# Altium PCB 无线传感K412.PcbDoc (part 1 of 2)
Units mm, origin at the board's own origin, x right, y up, seen from the top; angles counter-clockwise.
Board outline 54.33 x 73.61 mm, 2 copper layers (Top Layer, Bottom Layer); 38 components, 69 nets, 149 pads, 71 vias.
Unrouted connection lines stored in the file: 1.
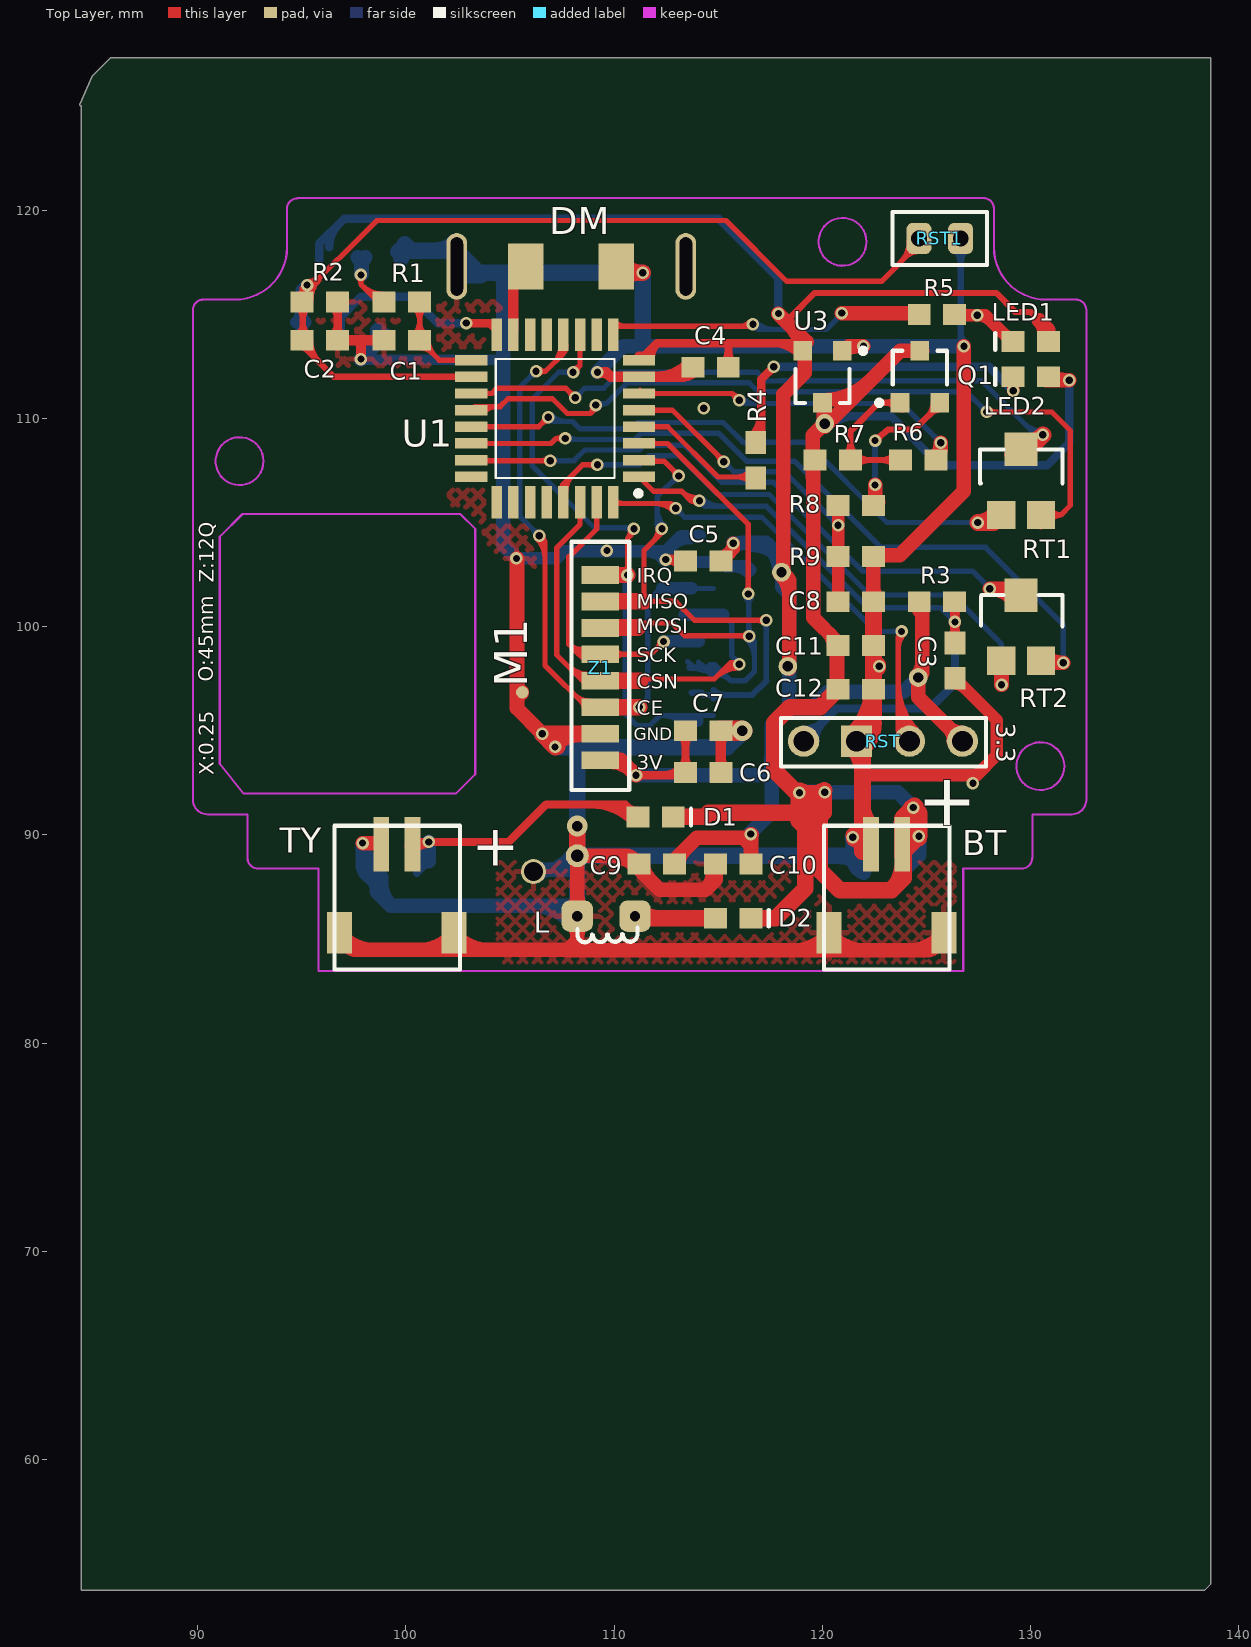
[diagram p0: Top Layer view]
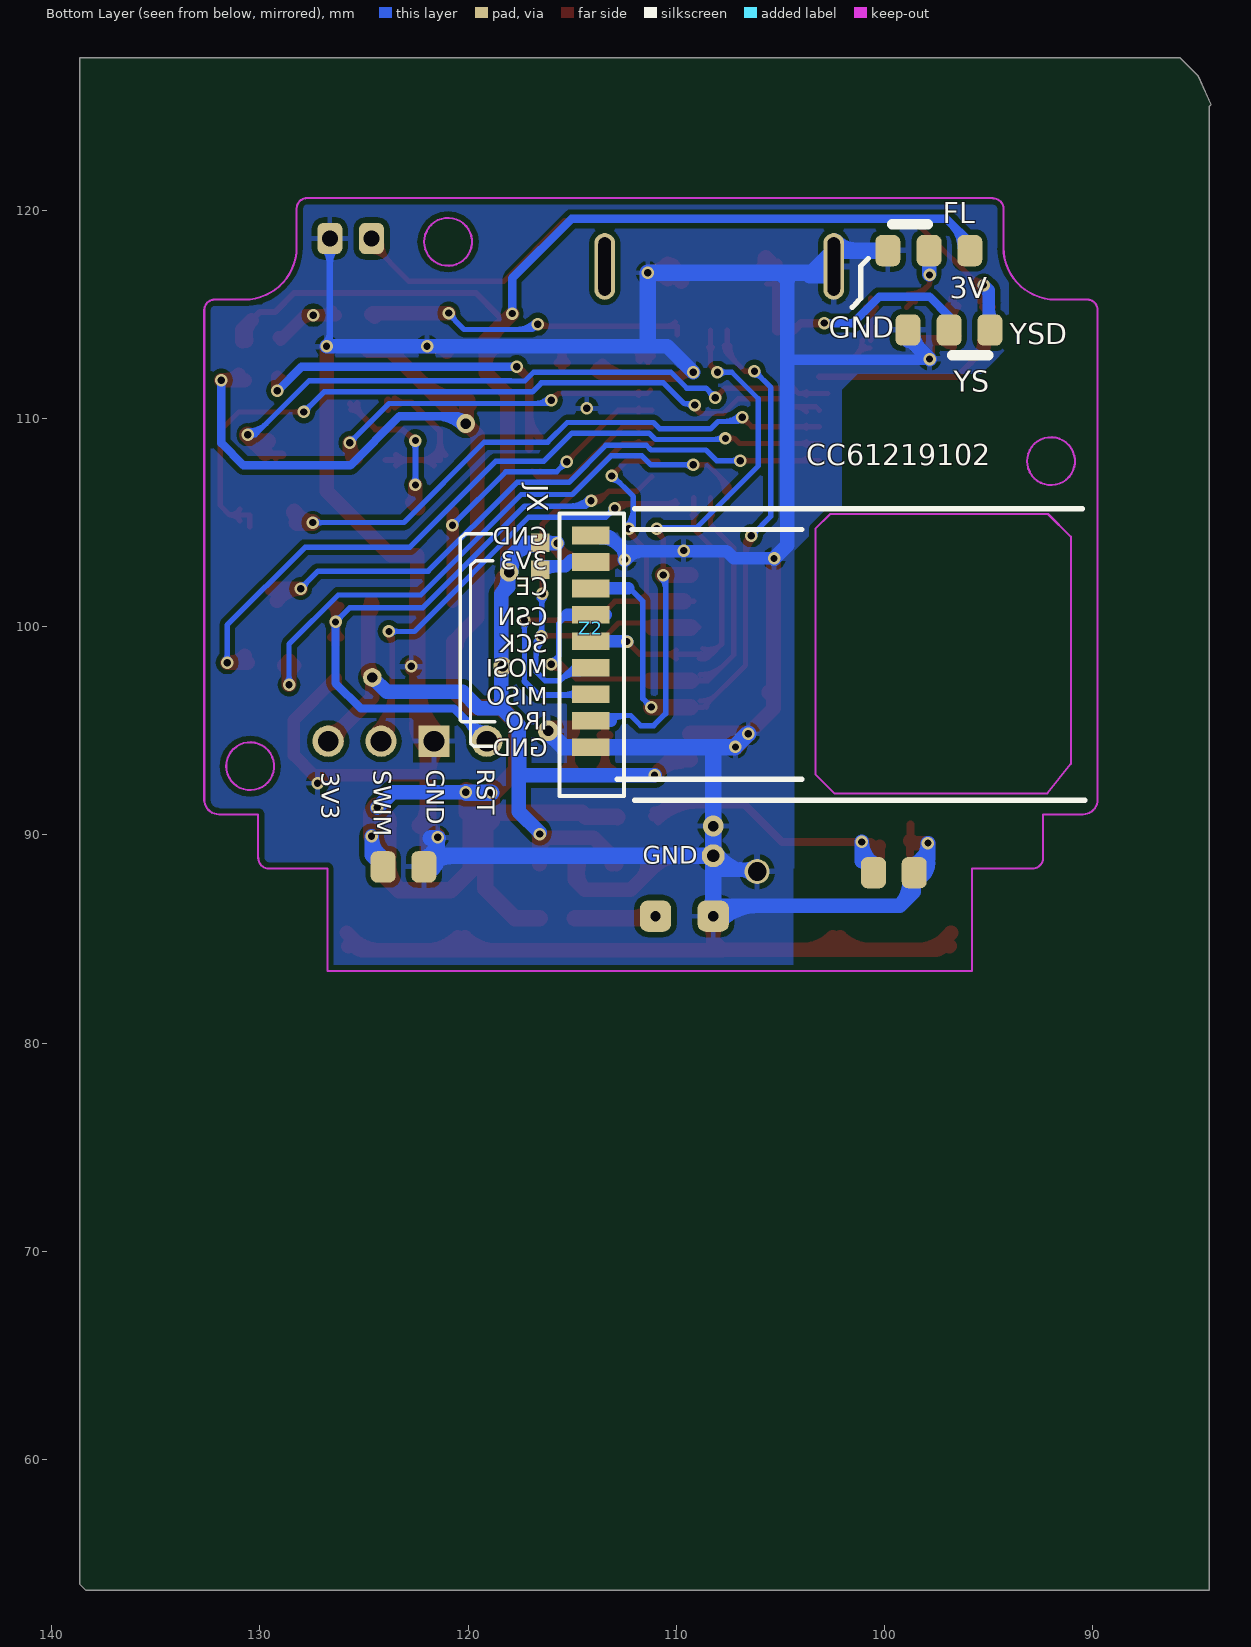
[diagram p1: Bottom Layer view, seen from below]

## Layer stack, top to bottom
Top Layer: signal copper 0.0356
Dielectric: dielectric 0.32, FR-4, Dk 4.8
Bottom Layer: signal copper 0.0356

## Board outline
84.328,125.07 84.404,124.993 84.404,53.721 138.354,53.721 138.659,54.026 138.659,127.33 85.827,127.33 84.938,126.441

## Design rules (kind name [scope] priority, off if disabled: settings)
Clearance [All] p1: gap=0.254
PolygonConnect [All] p1: connectstyle=Relief reliefconductorwidth=0.254 reliefentries=4 polygonreliefangle="90 Angle"
RoutingVias [All] p1: holewidth=0.711 width=1.27 viastyle="Through Hole" minholewidth=0.711 minwidth=1.27 maxholewidth=0.711 maxwidth=1.27
SilkscreenOverComponentPads [All] p1: minsilkscreentomaskgap=0.254
SolderMaskExpansion [All] p1: expansion=0.102
TestPointUsage FabricationTestPointUsage [All] p1: valid=0 allowmultiple=FALSE
Testpoint FabricationTestpoint [All] p1: side=3 testpointundercomponent=TRUE minsize=1.016 maxsize=2.54 preferedsize=1.524 minholesize=0 maxholesize=1.016 preferedholesize=0.813 testpointgrid=0.025 style=297 order=0-112345678
Width [All] p1: maxlimit=2 minlimit=0.254 preferedwidth=0.254 minimp=50.000000 maximp=50.000000 favimp=50.000000
23 further rules are at their usual default settings.

## Components (designator, comment, footprint, x,y, rotation, side; value= is the part's Value field where it differs from the comment)
BT "ZH1.5*2" MHDR1X6 123.1,89.55 r0 top locked
C1 "0.01uf" CR1608-0603 99.8,113.757 r180 top (schematic designator C6)
C2 "0.01uf" CR1608-0603 95.86,113.757 r0 top (schematic designator C7)
C3 "0.1uf" CR1608-0603 126.36,98.374 r90 top (schematic designator C9)
C4 "0.1uf" CR1608-0603 114.63,112.46 r180 top (schematic designator C6)
C5 "0.01uf" CR1608-0603 114.275,103.149 r180 top (schematic designator C3)
C6 "0.1uf" CR1608-0603 114.275,93 r0 top
C7 "10uf" CR1608-0603 114.275,95 r0 top (schematic designator C6)
C8 "100p" CR1608-0603 121.6,101.2 r180 top (schematic designator C12)
C9 "0.1uf" CR1608-0603 112.039,88.6 r0 top (schematic designator C8)
C10 "10uf" CR1608-0603 115.722,88.6 r0 top
C11 "10uf" CR1608-0603 121.6,99.1 r180 top (schematic designator C1)
C12 "22uf" CR1608-0603 121.6,97 r180 top (schematic designator R8)
D1 "SS14" CC1608-0603 111.989,90.856 r180 top (schematic designator D2)
D2 "1N4007" CC1608-0603 115.722,86 r180 top
DM "3*4*2小龟按键" HDR1X2#1 111.8,115.3 r0 top locked (schematic designator FW)
JX "" CR1005-0402 116.54,103.383 r90 bottom (schematic designator C3)
LED1 "LED-R" CC1608-0603 130,113.7 r0 top (schematic designator R1)
LED2 "LED-G" CC1608-0603 130,112 r0 top (schematic designator R1)
Q1 "S8550" SO-G3/C2.5#1 124.68,112 r0 top (schematic designator U3)
R1 "1K" CR1608-0603 99.8,115.6 r0 top
R2 "1M" CR1608-0603 95.86,115.6 r0 top
R3 "10K" CR1608-0603 125.5,101.2 r0 top (schematic designator R2)
R4 "470" CR1608-0603 116.8,108 r90 top (schematic designator R9)
R5 "1K" CR1608-0603 125.5,115 r0 top (schematic designator R9)
R6 "4.7K" CR1608-0603 124.6,108 r180 top
R7 "10K" CR1608-0603 120.5,108 r0 top (schematic designator R2)
R8 "180K" CR1608-0603 121.6,105.816 r0 top (schematic designator 7R)
R9 "360K" CR1608-0603 121.6,103.378 r180 top (schematic designator R8)
RST "2.54*4" HDR1X4 119.1,94.5 r0 top locked (schematic designator Saoxie)
RST1 "2.54*4" HDR1X2#2 124.1,118.643 r0 top locked (schematic designator Saoxie)
RT1 "100K" SO-G3/C2.5#2 129.54,107.264 r0 top locked (schematic designator U4)
RT2 "100K" SO-G3/C2.5#2 129.54,100.267 r0 top locked (schematic designator U4)
TY "ZH1.5*2" MHDR1X6 99.583,89.55 r0 top locked
U1 "STM8L151K4T6" TQFP32 107.163,110 r180 top locked
U3 "XC6206 9v  6ua 250ma" SO-G3/C2.5#1 120,112 r180 top
Z1 "SI24R1" MHDR1X8 109.322,102.482 r270 top
Z2 "NRF24L01" MHDR1X8 114.1,95.487 r90 bottom

## Footprints (in the part's own frame and the unit in brackets; to place one, negate y for a bottom-side part, rotate by r counter-clockwise, add the part's x,y. Pads: shape width x height; smd on the part's side, far side on the other; paste and mask are expansions set on the pad)
CC1608-0603 [mm] "Chip Capacitor; Body 1.6 x 0.8 mm (LxW typ)"
  rect 1.1x1 smd: 1(-0.85,0) 2(0.85,0)
  silkscreen extent -1.7,-0.4 -1.7,0.4
CR1005-0402 [mm]
  rect 0.9x0.9 smd: 1(-0.65,0) 2(0.65,0)
CR1608-0603 [mm] "Chip Resistor; Body 1.6 x 0.8 mm (LxW typ)"
  rect 1.1x1 smd: 1(-0.85,0) 2(0.85,0)
HDR1X2#1 [mm]
  rect 1.7x2.2 smd: 1(-6.047,2) 2(-1.7,2)
HDR1X2#2 [mm] "Connector; Header; 2 Position"
  rrect50% 1.2x1.5 hole 0.76: 1(0.539,0) 2(2.54,0)
  silkscreen extent -0.74,-1.27 3.81,1.27
HDR1X4 [mm] "Connector; Header; 4 Position"
  round 1.5 hole 1: 1(0,0) 3(5.08,0) 4(7.62,0)
  rect 1.5x1.5 hole 1: 2(2.54,0)
  silkscreen extent -1.08,-1.22 8.75,1.12
MHDR1X6 [mm] "Connector; Header; 6 Position"
  rect 0.76x2.6 smd: 1(-0.77,0) 2(0.73,0)
  silkscreen extent -3.02,-6.02 3.01,0.89
MHDR1X8 [mm] "Connector; Header; 8 Position"
  rect 0.85x1.8 smd: 1(0,0) 2(1.27,0) 3(2.54,0) 4(3.81,0) 5(5.08,0) 6(6.35,0) 7(7.62,0) 8(8.89,0)
  silkscreen extent -1.6,-1.36 10.33,1.4
SO-G3/C2.5#1 [mm]
  rect 0.9x0.95 smd: 1(-0.95,-1.25) 2(0.95,-1.25) 3(0,1.25)
  silkscreen extent -2.07,-1.37 1.3,1.25
SO-G3/C2.5#2 [mm]
  rect 1.35x1.35 smd: 1(-0.95,-1.9) 2(0.95,-1.9)
  rect 1.6x1.6 smd: 3(0,1.25)
  silkscreen extent -1.96,-0.38 1.99,1.25
TQFP32 [mm] "QFP; 32 Leads; Body 7 x 7 mm; Pitch 0.8 mm"
  rect 1.55x0.5 smd: 1(-4.025,2.8) 2(-4.025,2) 3(-4.025,1.2) 4(-4.025,0.4) 5(-4.025,-0.4) 6(-4.025,-1.2) 7(-4.025,-2) 8(-4.025,-2.8) 18(4.025,-2) 19(4.025,-1.2) 20(4.025,-0.4) 21(4.025,0.4) 22(4.025,1.2) 23(4.025,2) 24(4.025,2.8)
  rect 0.5x1.55 smd: 9(-2.8,-4.025) 10(-2,-4.025) 11(-1.2,-4.025) 12(-0.4,-4.025) 13(0.4,-4.025) 14(1.2,-4.025) 15(2,-4.025) 16(2.8,-4.025) 26(2,4.025) 27(1.2,4.025) 28(0.4,4.025) 29(-0.4,4.025) 30(-1.2,4.025) 31(-2,4.025) 32(-2.8,4.025)
  rect 1.55x0.5 smd mask+0.102: 17(4.025,-2.8)
  rect 0.5x1.55 smd paste+0: 25(2.8,4.025)
  silkscreen extent -4.13,-2.85 2.85,3.72

## Part data
C1 C4 C6 C7 C8 C9 C11 C12 LED1 LED2 R2 R3 R7 R8 R9: library part Res3, "Resistor"
C2 C3 C10: library part "Cap Semi", "Capacitor (Semiconductor SIM Model)"
C5: library part "Cap Semi", "Capacitor (Semiconducto"
D1 D2 R1: library part "Diode 1N4007", "1 Amp General Purpose Rectifier"
JX: library part "Cap Semi", "Capacit"
R4 R5 R6: library part "Cap Pol3"
RST RST1: library part "Header 4", "Header, 4-Pin"
U1: library part ST72F324K4T6

## Free pads (board coordinates)
  rrect50% 1.2x1.5 smd far side: 0(94.945,114.249) 0(95.91,118.059) 0(96.901,114.249) 0(97.866,118.059) 0(98.577,88.189) 0(98.882,114.249) 0(99.847,118.059) 0(100.533,88.189) 0(122.123,88.468) 0(124.079,88.468)
  rect 1.2x2 smd: 0(96.81,85.306) 0(102.314,85.306) 0(120.327,85.306) 0(125.831,85.306)
  oval 1x3.2 hole 0.6 slot 2.8 at 90 deg: 0(102.442,117.3) 0(113.44,117.3)
  round 1.2 hole 0.9: 0(106.121,88.24)
  round 1.1 hole 0.6: 0(108.229,89.002)
  rect 1.8x0.85 smd far side: 0(114.1,94.217)
  round 0.9 hole 0.5: 1(118.034,102.616) 1(118.339,98.095) 1(124.6,97.561)
  round 0.6 smd: 3(105.588,96.85)
  rrect50% 1.5x1.5 hole 0.5: 3(108.229,86.1) 3(111,86.1)

## Via types
v1: diameter 0.6, hole 0.35, Top Layer to Bottom Layer, 68 vias
v2: diameter 1, hole 0.5, Top Layer to Bottom Layer, 2 vias
v3: diameter 0.9, hole 0.5, Top Layer to Bottom Layer, 1 vias

## Nets (pads, with @x,y where several pads share a name; then routed paths per layer and width w, separated by ;. In a path a pad name is that pad's centre, name@x,y a point inside that pad or via, vN(x,y) a via of type N, cw(c..) or ccw(c..) an arc to the next point about the centre after c; other vN are vias at no path point)
3.3V: 
3V3: C4.1 C5.1 C6.1 C7.1 C9.2 C10.2 JX.1 JX.2 LED1.2 pad.0@95.91,118.059 pad.1 R3.1 RST.4 U1.8 U3.2 Z1.8 Z2.7 | length 148.8
  Top Layer w0.3: 118.516,114.91 119.634,116.027 128.346,116.027 129.261,115.113 129.997,115.113 130.4,114.71
  Top Layer w0.4: v1(111.049,92.862) 113.146,92.862 113.425,93.142 C7.1@113.425,95.123 ; U1.8@111.188,113.011 111.461,113.011 112.065,113.614 ; U1.8@111.364,112.775 cw(c111.645,112.795) U1.8@111.446,112.995 ; U1.8@111.763,112.804 cw(c112.801,112.878) 112.065,113.614 ; 112.319,92.862 ccw(c112.319,94.056) C6.1@113.163,93.212 ; C6.1@113.213,93.212 ccw(c112.701,93.724) 113.425,93.724 ccw(c114.149,93.724) C6.1@113.637,93.212 ; C7.1@113.213,94.788 cw(c112.701,94.276) 113.425,94.276 cw(c114.149,94.276) C7.1@113.637,94.788 ; C4.1@115.268,112.672 ccw(c114.723,113.217) 115.494,113.217 ; C4.1@115.48,112.471 115.494,112.485 115.494,113.614 ; 115.494,113.151 ccw(c116.172,113.151) C4.1@115.692,112.672 ; 117.627,113.614 cw(c117.627,111.852) U3.2@118.873,113.098 ; 118.593,113.614 cw(c118.593,112.818) U3.2@119.156,113.381 ; U3.2@119.15,113.25 118.786,113.614 115.494,113.614 ; 112.065,113.614 115.494,113.614
  Top Layer w0.65: C5.1@115.125,103.149 115.722,103.747 v1(115.722,104.013) cw(c115.02,104.013) C5.1@115.144,103.322 ; C5.1@115.35,103.149 cw(c115.893,103.149) C5.1@115.509,103.533
  Top Layer w0.7: Z1.8@109.322,93.599 110.312,93.599 v1(111.049,92.862) ; Z1.8@109.797,93.517 cw(c109.797,92.074) 110.817,93.094 ; C9.2@112.889,88.6 112.889,88.785 113.97,89.865 116.191,89.865 116.572,89.484 ; C9.2@113.089,88.6 cw(c114.018,88.6) 113.361,89.257 ; C10.2@116.572,88.6 116.572,89.484 ; v1@116.572,90.043 116.572,89.484 ; v1(117.886,115.037) 119.234,113.689 U3.2@119.075,113.529 ; pad.1@117.963,102.545 cw(c116.873,101.455) 118.415,101.455 ; pad.1@118.022,102.517 cw(c117.973,102.077) 118.415,102.077 ; pad.1@118.034,102.616 pad.1@118.11,102.54 ; pad.1@118.11,102.514 pad.1@118.11,102.54 ; pad.1@118.415,97.993 118.415,102.235 pad.1@118.11,102.54 ; 118.456,114.467 cw(c117.265,113.275) U3.2@118.95,113.275 ; U3.2@118.979,113.154 cw(c118.567,112.742) 119.15,112.742 ; U3.2@119.15,113.25 119.15,112.19 118.11,111.15 pad.1@118.11,102.54 ; pad.1@124.529,97.632 ccw(c123.876,98.286) 124.8,98.286 ; R3.1@124.594,101.094 cw(c124.097,100.596) 124.8,100.596 ; R3.1@124.6,101.088 cw(c124.201,100.641) 124.8,100.641 ; R3.1@124.65,101.2 124.65,100.8 124.8,100.65 124.8,97.761 pad.1@124.6,97.561 124.6,96.62 RST.4@126.72,94.5 ; RST.4@126.32,94.5 ccw(c125.354,94.5) 126.037,95.183 ccw(c126.72,95.866) RST.4@126.72,94.9 ; LED1.2@130.655,113.74 ccw(c129.696,114.006) 130.4,114.71 130.85,114.26 LED1.2@130.85,113.7 ; 116.252,89.865 ccw(c116.252,90.352) 116.596,90.008 cw(c116.252,90.352) 116.252,89.865
  Bottom Layer w0.4: pad.0@95.834,117.602 95.834,118.389 97.028,119.583 115.037,119.583 117.886,116.733 v1(117.886,115.037) ; pad.0@96.31,118.209 cw(c97.895,118.209) 96.775,119.33
  Bottom Layer w0.6: Z2.7@113.722,103.107 114.943,103.107 115.037,103.2 115.341,102.895 116.378,102.895 JX.1@116.54,102.733 ; 115.787,102.895 cw(c115.787,101.98) JX.1@116.434,102.627
  Bottom Layer w0.7: v1(111.049,92.862) 117.551,92.862 117.551,93.726 ; v1(115.722,104.013) 116.103,104.013 116.083,104.033 117.285,104.033 118.085,103.233 118.085,101.905 118.415,101.575 ; JX.2@116.54,103.933 cw(c116.54,101.895) 117.982,103.336 ; v1@116.572,90.119 117.577,91.123 117.577,95.275 118.389,96.088 ; 117.391,103.927 cw(c116.08,102.616) pad.1@117.934,102.616 ; pad.1@118.131,102.592 ccw(c119.175,102.335) 118.415,101.575 ; pad.1@124.6,97.561 123.914,96.876 120.269,96.876 119.482,96.088 118.415,96.088 ; 118.389,96.088 118.415,96.063 118.415,96.088 ; 118.389,96.088 118.415,96.088 ; 118.415,96.088 118.415,101.575
  other v1: 116.561,90.043
4.2V: 
5V: D1.2 pad.0@100.533,88.189 TY.2 | length 22.2
  Top Layer w0.4: TY.2@100.305,89.179 100.787,89.662 ; TY.2@100.401,89.276 cw(c101.092,88.585) v1@101.092,89.562 ; TY.2@100.441,89.423 cw(c101.018,88.845) v1@101.018,89.662 ; TY.2@100.474,89.469 cw(c100.787,89.312) 100.787,89.662 ; 108.893,91.465 cw(c108.893,88.66) D1.2@110.876,90.644 ; 109.858,91.465 cw(c109.858,89.626) D1.2@111.159,90.927 ; 110.541,91.453 cw(c109.944,90.856) D1.2@110.789,90.856 ; D1.2@110.662,91.333 ccw(c111.089,91.759) D1.2@111.089,91.156 ; D1.2@111.139,90.856 110.529,91.465 106.731,91.465 104.927,89.662 v1(101.092,89.662) 100.787,89.662
  Top Layer w0.6: TY.2@100.243,89.479 100.279,89.443 TY.2@100.279,88.976
  Bottom Layer w0.4: pad.0@100.533,88.189 pad.0@101.092,88.748
  Bottom Layer w0.7: pad.0@100.419,88.561 ccw(c99.855,89.662) v1(101.092,89.662) pad.0@101.092,88.748
38BC1: 
38BC2: 
<Z: 
AM: 
BH1: 
BH2: 
BI-R: 
BT: BT.2 C11.2 C12.2 D1.1 D2.1 LED2.2 pad.0@124.079,88.468 Q1.3 R7.1 U3.3 | length 120.3
  Top Layer w0.7: 119.507,90.195 119.736,89.967 ; 119.532,107.188 119.532,109.195 120.066,109.728 U3.3@120.066,110.592 ; 119.532,107.475 cw(c120.125,107.475) R7.1@119.706,107.894 ; 119.532,108.525 ccw(c120.125,108.525) R7.1@119.706,108.106 ; R7.1@119.552,108.037 119.552,100.437 120.701,99.289 C12.2@120.701,97 ; U3.3@119.929,110.654 cw(c119.517,110.242) 120.1,110.242 ; U3.3@120,110.875 ccw(c120,114.171) 122.331,111.84 ; U3.3@120.1,110.75 120.1,109.61 123.74,113.25 Q1.3@124.8,113.25 ; v3@120.117,109.853 ccw(c120.117,110.401) 120.504,110.014 ; 120.31,99.679 cw(c119.731,99.1) C11.2@120.55,99.1 ; BT.2@123.855,89.533 cw(c124.638,88.987) v1(124.638,89.941) 124.251,89.941 ; LED2.2@130.734,111.836 v1(131.851,111.836) ; LED2.2@131.006,112.106 ccw(c131.658,112.758) v1@131.658,111.836
  Top Layer w0.8: D1.1@112.839,90.856 112.852,90.869 114.339,90.869 114.529,91.059 118.866,91.059 ; D2.1@116.572,86 117.75,86 119.177,87.427 119.177,90.362 ; v1@118.897,91.999 120.053,91.999 120.053,91.059 120.002,91.11 ; v1@118.926,92.12 cw(c118.696,91.343) 119.507,91.343 ; v1@118.964,92.099 cw(c117.874,90.883) 119.507,90.883 ; 119.177,90.576 119.177,90.362 ; 119.329,89.127 119.329,90.209 119.177,90.362 ; 119.431,89.967 119.507,89.967 ; 119.507,89.663 119.507,89.967 ; 119.507,90.887 cw(c121.189,90.887) v1@120.049,92.123 ; 119.507,91.356 cw(c120.333,91.356) v1@120.087,92.145 ; 119.507,91.719 119.507,91.059 ; 119.558,89.967 119.736,89.967 119.507,89.967 ; C12.2@120.75,97 119.889,96.139 118.44,96.139 117.696,95.395 117.696,93.099 118.866,91.928 118.866,91.059 ; 123.323,87.356 ccw(c122.049,88.63) BT.2@123.85,88.63 ; BT.2@123.81,90.47 cw(c124.523,90.47) 124.019,90.974 ; BT.2@123.827,90.45 ccw(c123.991,91.35) 124.638,90.703 ; BT.2@123.83,89.53 ccw(c123.83,90.486) v1@124.506,89.81 ; BT.2@124.053,89.681 ccw(c123.979,89.942) 124.251,89.942 124.251,90.316 ; 124.251,89.554 cw(c124.755,89.554) v1@124.609,90.037 ; v1@124.258,91.313 ccw(c124.692,91.313) 124.385,91.007 ; 124.384,91.008 124.435,90.957 ; v1@124.446,91.362 cw(c123.984,91.103) 124.358,90.729 124.308,90.678 ccw(c123.861,91.125) v1@124.452,91.348 ; v1@124.45,91.352 cw(c123.585,90.982) 124.251,90.316 ; v1@124.554,89.886 cw(c125.098,90.244) 124.638,90.703 ; v1@124.612,89.845 cw(c124.739,90.316) 124.251,90.316 ; 124.638,90.805 124.638,91.034 ; 118.866,91.059 119.507,91.059 ; 118.866,91.059 118.866,90.672 119.177,90.362 ; 119.507,89.967 119.507,90.195 119.507,91.059 ; 119.507,91.059 119.863,91.059 119.863,88.316 120.828,87.351 123.317,87.351 123.895,87.929 BT.2@123.895,88.915 ; BT.2@123.895,88.915 123.895,89.199 v1(124.638,89.941) 124.638,90.703 ; BT.2@123.895,88.915 123.83,88.98 BT.2@123.83,89.55 123.83,90.785 v1(124.358,91.313) 124.638,91.034 ; 124.251,90.316 124.638,90.703 ; v1@124.429,91.384 cw(c123.925,90.88) 124.638,90.88 ; v1@124.429,91.384 cw(c123.925,90.88) 124.638,90.88 ; v1@124.429,91.384 cw(c123.925,90.88) 124.638,90.88 ; v1@124.429,91.384 cw(c123.925,90.88) 124.638,90.88 ; 124.638,90.703 124.638,91.034 ; BT.2@123.83,90.45 ccw(c123.83,91.052) 124.256,90.626 cw(c123.83,91.052) BT.2@123.83,90.45 ; v1@124.424,91.388 cw(c124.013,90.918) 124.638,90.918 ccw(c124.013,90.918) v1@124.424,91.388
  Bottom Layer w0.4: v3@120.011,109.859 cw(c120.613,109.257) 120.613,110.109 ; v3(120.117,109.753) 120.472,110.109 123.292,110.109 125.654,107.747 130.785,107.747 131.851,108.814 v1(131.851,111.836) ; v3@120.293,109.577 cw(c121.579,108.291) 121.579,110.109
  Bottom Layer w0.7: v1(120.117,92.05) 123.622,92.05 v1@124.356,91.315 ; pad.0@123.965,88.841 ccw(c123.401,89.941) v1(124.638,89.941) 124.638,89.027 pad.0@124.079,88.468
  Bottom Layer w0.8: v1(118.897,92.024) 120.091,92.024 v1(120.117,92.05)
BTJC: R6.1 U1.6 | length 20.4
  Top Layer w0.254: U1.6@111.245,111.354 111.398,111.2 115.673,111.2 v1(116.002,110.871) ; U1.6@111.8,111.113 cw(c112.01,110.903) 112.01,111.2 cw(c112.01,111.497) U1.6@111.8,111.287 ; v1@115.829,110.871 ccw(c115.411,110.871) 115.706,111.166 ccw(c116.002,111.462) v1@116.002,111.044
  Top Layer w0.6: R6.1@125.368,108.15 ccw(c124.761,108.839) v1(125.679,108.839) R6.1@125.679,108.43 ; R6.1@125.556,108.2 R6.1@125.603,108.153
  Top Layer w0.7: R6.1@125.394,108.106 ccw(c124.706,108.795) v1@125.679,108.795 ; R6.1@125.679,108.456 v1(125.679,108.839)
  Bottom Layer w0.254: v1(116.002,110.871) 116.154,110.719 123.8,110.719 v1(125.679,108.839) ; v1@116.124,110.993 ccw(c116.787,111.657) 116.787,110.719 ; v1@125.506,108.839 ccw(c125.089,108.839) 125.384,109.134 ccw(c125.679,109.43) v1@125.679,109.012
CE: U1.12 Z1.6 Z2.6 | length 42.2
  Top Layer w0.254: v1(106.248,112.268) 106.705,112.268 107.563,113.125 U1.12@107.563,114.236 ; v1@106.278,104.246 cw(c105.308,103.276) 106.68,103.276 ; v1@106.371,112.146 cw(c106.666,111.85) 106.666,112.268 cw(c106.666,112.686) v1@106.371,112.39 ; v1(106.401,104.369) 106.68,104.089 ; v1@106.408,104.196 cw(c106.422,103.831) 106.68,104.089 ; v1@106.458,104.426 cw(c105.922,103.89) 106.68,103.89 ; v1@106.573,104.362 ccw(c106.938,104.347) 106.68,104.089 ; 107.088,112.65 ccw(c106.238,113.5) U1.12@107.44,113.5 ; U1.12@107.476,113.413 cw(c107.266,113.203) 107.563,113.203 cw(c107.86,113.203) U1.12@107.65,113.413 ; 107.521,113.084 ccw(c107.105,113.5) U1.12@107.694,113.5 ; 108.077,96.749 ccw(c108.847,97.519) Z1.6@108.847,96.43 ; Z1.6@108.446,96.38 cw(c108.199,96.132) Z1.6@108.549,96.132 ; Z1.6@109.322,96.132 108.694,96.132 106.68,98.146 106.68,104.089
  Top Layer w0.8: Z1.6@109.322,96.132 v1@111.201,96.132
  Bottom Layer w0.254: v1@106.075,112.268 cw(c105.658,112.268) 105.953,111.973 cw(c106.248,111.677) v1@106.248,112.095 ; v1@106.228,104.369 ccw(c105.81,104.369) 106.105,104.664 ccw(c106.401,104.959) v1@106.401,104.542 ; v1(106.248,112.268) 105.461,111.481 105.461,105.308 v1(106.401,104.369) ; v1(111.201,96.139) 111.608,96.545 111.608,101.219 112.226,101.837 Z2.6@114.766,101.837 ; v1@111.201,96.312 ccw(c111.201,96.73) 111.497,96.434 ccw(c111.792,96.139) v1@111.374,96.139 ; Z2.6@113.414,101.626 ccw(c112.906,101.118) 112.906,101.837 ccw(c112.906,102.556) Z2.6@113.414,102.048
  Bottom Layer w0.6: 112.319,101.837 Z2.6@113.722,101.837
CKTS: 
CSN: U1.30 Z1.5 Z2.5 | length 27.9
  Top Layer w0.254: 107.73,98.163 ccw(c108.847,99.279) Z1.5@108.847,97.7 ; 108.163,97.729 ccw(c108.847,98.412) Z1.5@108.847,97.446 ; U1.30@108.276,105.363 cw(c108.066,105.153) 108.363,105.153 cw(c108.66,105.153) U1.30@108.45,105.363 ; U1.30@108.363,106.186 108.363,104.908 107.239,103.784 107.239,98.654 108.483,97.409 109.296,97.409 109.144,97.257 Z1.5@109.322,97.402 ; 111.252,97.485 114.808,97.485 115.591,98.268 ; 114.883,97.56 cw(c116.002,96.441) v1@116.002,98.023 ; 115.316,97.993 cw(c116.002,97.308) v1@116.002,98.277 ; v1@115.85,98.114 ccw(c115.591,97.973) 115.591,98.268 ; v1@115.983,98.268 115.591,98.268
  Top Layer w0.8: Z1.5@109.296,97.409 111.252,97.409
  Bottom Layer w0.254: 115.231,100.567 115.646,100.152 115.646,98.604 v1@115.983,98.268 ; 115.669,98.581 cw(c115.285,98.196) v1@115.829,98.196 ; 115.796,98.455 ccw(c116.002,98.661) v1@116.002,98.369
  Bottom Layer w0.6: Z2.5@113.386,100.567 115.231,100.567
  other v1: 116.002,98.196
DCJC: 
DM: DM.1 U1.15 | length 6.1
  Top Layer w0.254: DM.1@105.653,116.459 105.054,116.459 105.639,117.043 DM.1@105.753,117.3
  Top Layer w0.5: U1.15@105.163,114.236 DM.1@105.163,117.431
  Top Layer w0.8: DM.1@105.715,117.119 105.715,117.678 105.486,117.45 DM.1@105.753,117.3
DM-D: 
DYKG: 
DYKZ: 
FI-R: 
FL: C1.1 R1.2 U1.17 | length 9.2
  Top Layer w0.254: C1.1@100.386,114.021 ccw(c99.725,114.682) 100.66,114.682 ; R1.2@100.386,115.336 cw(c99.725,114.675) 100.66,114.675 ; C1.1@100.66,113.757 R1.2@100.66,115.773 ; 100.66,114.633 ccw(c101.526,114.633) C1.1@100.914,114.021 ; 100.66,114.724 cw(c101.526,114.724) R1.2@100.914,115.336 ; C1.1@100.7,113.384 cw(c100.7,112.604) 101.251,113.156 ; C1.1@100.95,113.457 101.396,113.011 101.607,112.8 U1.17@103.138,112.8 ; C1.1@101.073,113.757 ccw(c102.094,113.757) 101.372,113.035 ; U1.17@102.526,112.713 ccw(c102.316,112.503) 102.316,112.8 ccw(c102.316,113.097) U1.17@102.526,112.887
FL+: RT1.2 U1.20 | length 40.4
  Top Layer w0.254: U1.20@103.138,110.4 103.307,110.569 104.524,110.569 104.902,110.947 107.036,110.947 107.747,110.236 108.864,110.236 ; U1.20@103.75,110.313 cw(c104.368,109.695) 104.368,110.569 ; v1@108.953,110.592 cw(c108.613,110.488) 108.864,110.236 ; v1@109.042,110.414 108.864,110.236 ; v1(127.889,110.312) 131.013,110.312 131.902,109.423 131.902,105.816 131.45,105.364 ; v1@128.011,110.19 cw(c128.307,109.895) 128.307,110.312 cw(c128.307,110.73) v1@128.011,110.435 ; RT1.2@130.49,104.79 RT1.2@130.49,105.364 131.45,105.364 ; RT1.2@130.962,105.086 cw(c131.45,104.797) 131.45,105.364 ; RT1.2@130.962,105.643 ccw(c131.45,105.931) 131.45,105.364
  Bottom Layer w0.254: v1@109.195,110.566 109.347,110.719 109.626,110.719 ; v1@109.255,110.537 cw(c109.626,110.249) 109.626,110.719 ; v1@127.716,110.312 ccw(c127.298,110.312) 127.594,110.608 ccw(c127.889,110.903) v1@127.889,110.485 ; v1(127.889,110.312) 126.924,111.277 116.916,111.277 116.484,111.709 110.617,111.709 109.626,110.719
  other v1: 109.118,110.642
FL-: RT1.1 U1.21 | length 32.3
  Top Layer w0.254: U1.21@103.138,109.6 106.374,109.6 v1(106.832,110.058) ; U1.21@103.75,109.513 cw(c103.96,109.303) 103.96,109.6 cw(c103.96,109.897) U1.21@103.75,109.687 ; v1@106.659,110.058 cw(c106.242,110.058) 106.537,109.763 cw(c106.832,109.468) v1@106.832,109.885 ; RT1.1@128.229,105.004 RT1.1@128.59,105.364
  Top Layer w0.8: RT1.1@128.229,105.004 v1(127.457,105.004) ccw(c127.457,106.056) RT1.1@128.355,105.507
  Bottom Layer w0.254: v1@106.775,110.001 ccw(c107.127,110.353) 107.127,109.855 ; v1(106.832,110.058) 107.036,109.855 108.001,109.855 108.356,109.499 110.795,109.499 111.1,109.804 115.24,109.804 116.18,108.864 119.228,108.864 123.088,105.004 v1(127.457,105.004) ; v1@106.955,110.181 ccw(c107.741,110.966) 107.741,109.855 ; v1@127.335,104.881 ccw(c127.04,104.586) 127.04,105.004 ccw(c127.04,105.421) v1@127.335,105.126
FL-IN: pad.0@97.866,118.059 R1.1 | length 6.3
  Top Layer w0.254: v1@97.718,116.768 cw(c97.423,116.473) 97.841,116.473 cw(c98.258,116.473) v1@97.963,116.768 ; v1(97.841,116.891) 97.841,116.434 R1.1@98.95,115.324 ; 97.878,116.396 ccw(c98.9,117.418) R1.1@98.9,115.973 ; 98.312,115.963 ccw(c98.9,116.551) R1.1@98.9,115.719 ; R1.1@98.423,115.852 cw(c98.171,115.6) R1.1@98.527,115.6
  Bottom Layer w0.254: v1(97.841,116.891) v1@97.866,116.916 ; pad.0@97.866,117.526 pad.0@97.87,117.522
  Bottom Layer w0.7: pad.0@97.689,117.732 cw(c97.263,117.306) 97.866,117.306 cw(c98.47,117.306) pad.0@98.043,117.732 ; v1@97.866,116.916 pad.0@97.866,117.526
FL-RT: RT1.3 U1.19 | length 37.8
  Top Layer w0.254: U1.19@102.718,111.201 104.127,111.201 104.381,111.455 107.671,111.455 v1@108.242,110.884 ; U1.19@103.75,111.113 cw(c103.962,110.9) 103.962,111.201 ; U1.19@103.75,111.287 ccw(c103.957,111.494) 103.957,111.201 ; v1@107.955,110.998 ccw(c107.537,110.998) 107.832,111.293 ccw(c108.128,111.589) v1@108.128,111.171 ; RT1.3@129.235,108.052 RT1.3@129.54,108.514
  Top Layer w0.4: RT1.3@128.93,108.255 129.438,108.255 RT1.3@129.769,108.585
  Top Layer w0.8: RT1.3@129.615,108.907 ccw(c129.822,109.98) 130.594,109.207 RT1.3@129.743,108.356
  Bottom Layer w0.254: v1@108.128,111.171 ccw(c108.128,111.589) 108.423,111.293 ccw(c108.718,110.998) v1@108.301,110.998 ; v1@108.242,110.884 108.242,111.112 108.585,111.455 109.499,111.455 110.261,112.217 116.865,112.217 117.28,111.803 117.948,111.803 117.955,111.811 127.635,111.811 130.226,109.22 ; 129.679,109.767 ccw(c130.581,110.669) v1@130.581,109.393 ; 130.113,109.333 ccw(c130.581,109.802) v1@130.581,109.139 ; v1@130.445,109.113 ccw(c130.226,108.941) 130.226,109.22 ; v1@130.445,109.327 cw(c130.226,109.499) 130.226,109.22 ; v1@130.594,109.22 130.226,109.22
  other v1: 130.581,109.22 108.128,110.998
FL-U: 